# Altium PCB 82230KPC-1-K-1V0-241216.PcbDoc (part 1 of 2)
Units mm, origin at the board's own origin, x right, y up, seen from the top; angles counter-clockwise.
Board outline 63.4 x 81.4 mm, 2 copper layers (Top Layer, Bottom Layer); 105 components, 68 nets, 293 pads, 137 vias.
Unrouted connection lines stored in the file: 29.
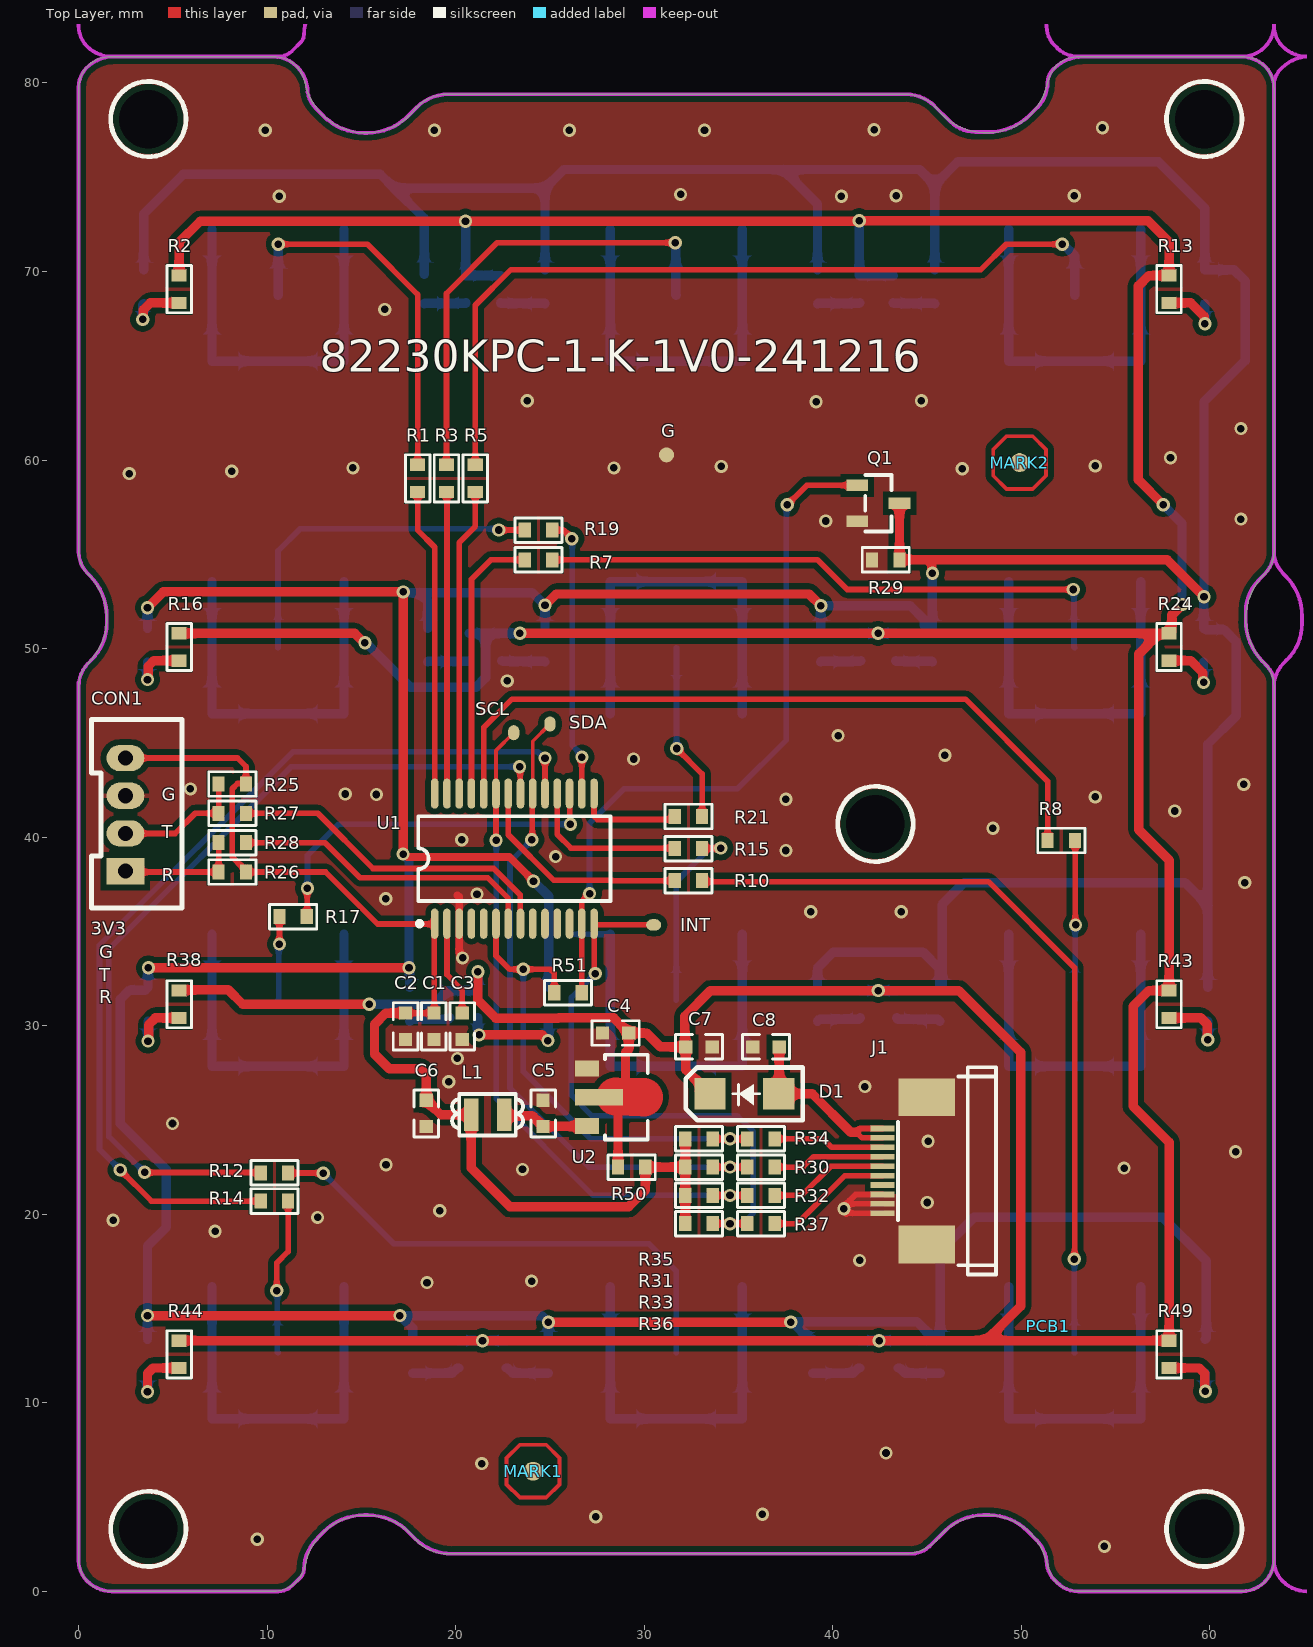
[diagram p0: Top Layer view]
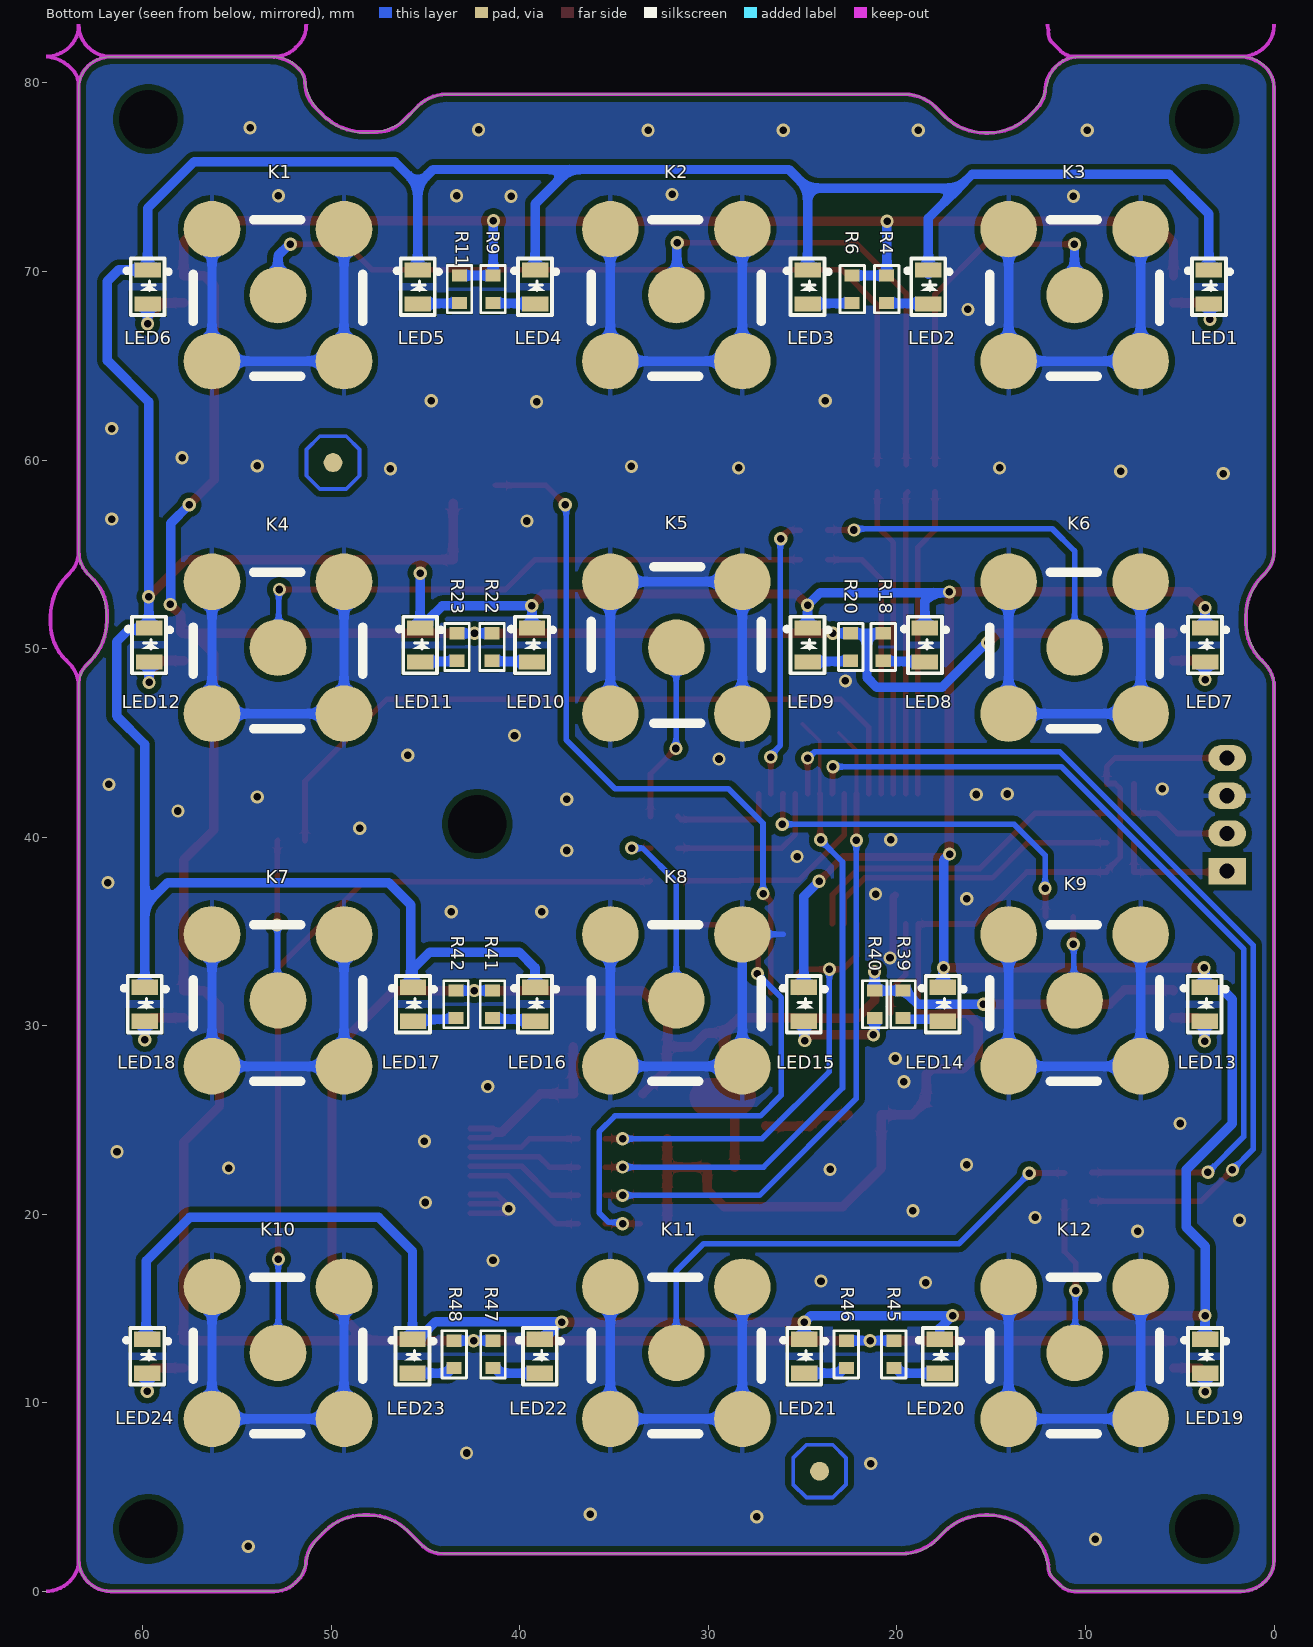
[diagram p1: Bottom Layer view, seen from below]
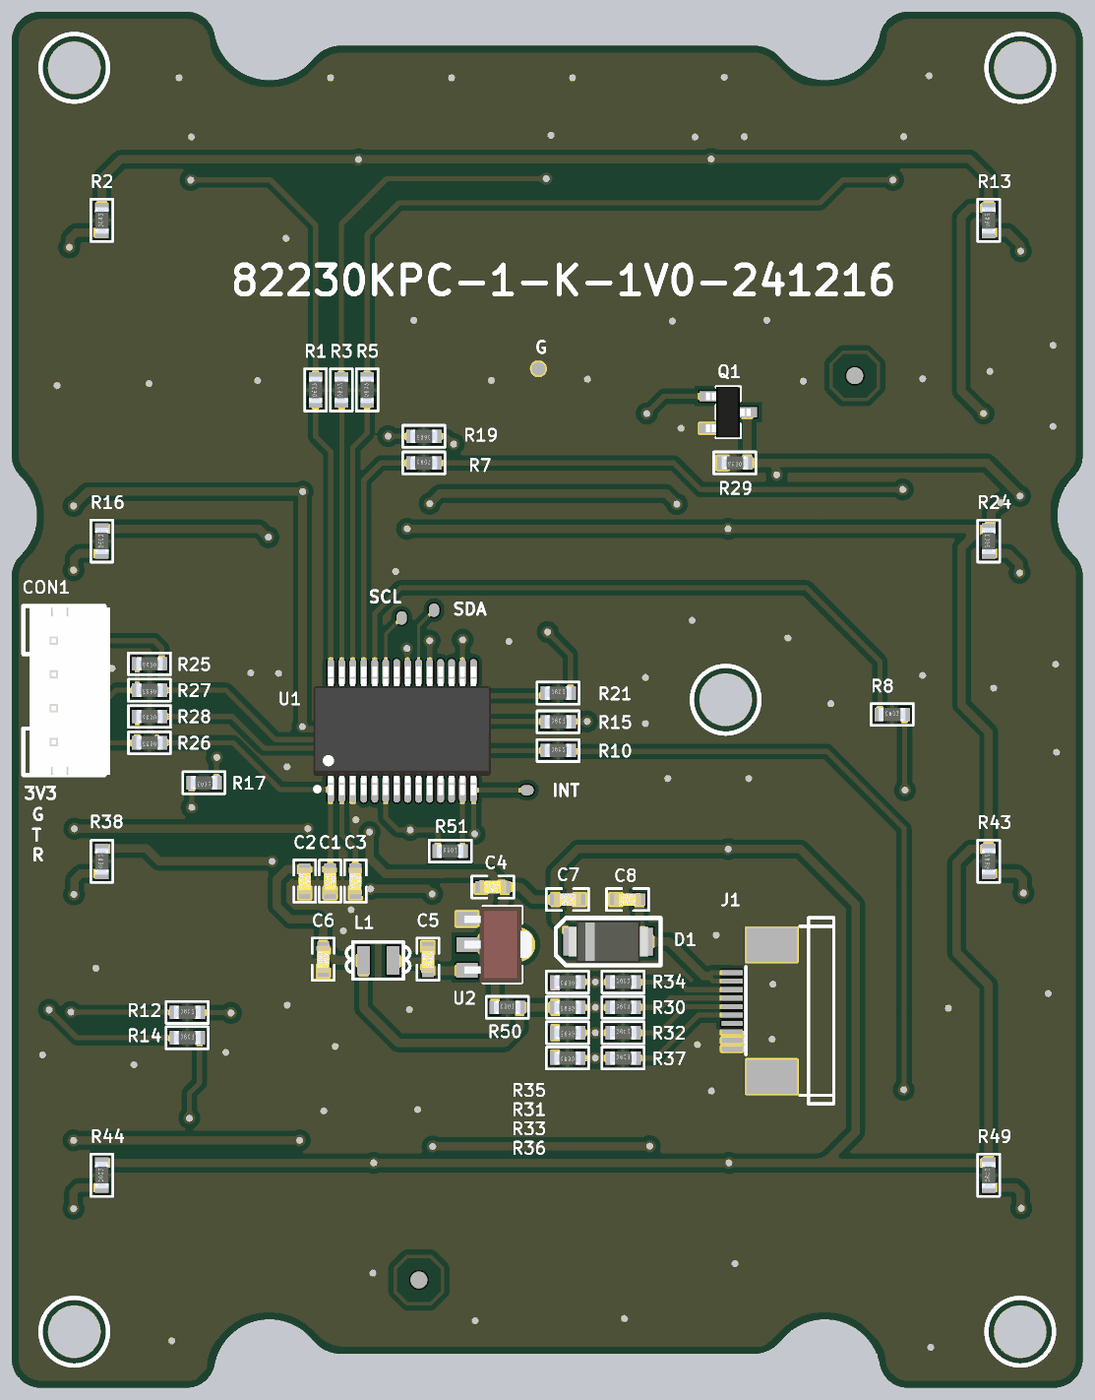
[diagram p3: 3D render of the assembled board from above, using the file's embedded part models]
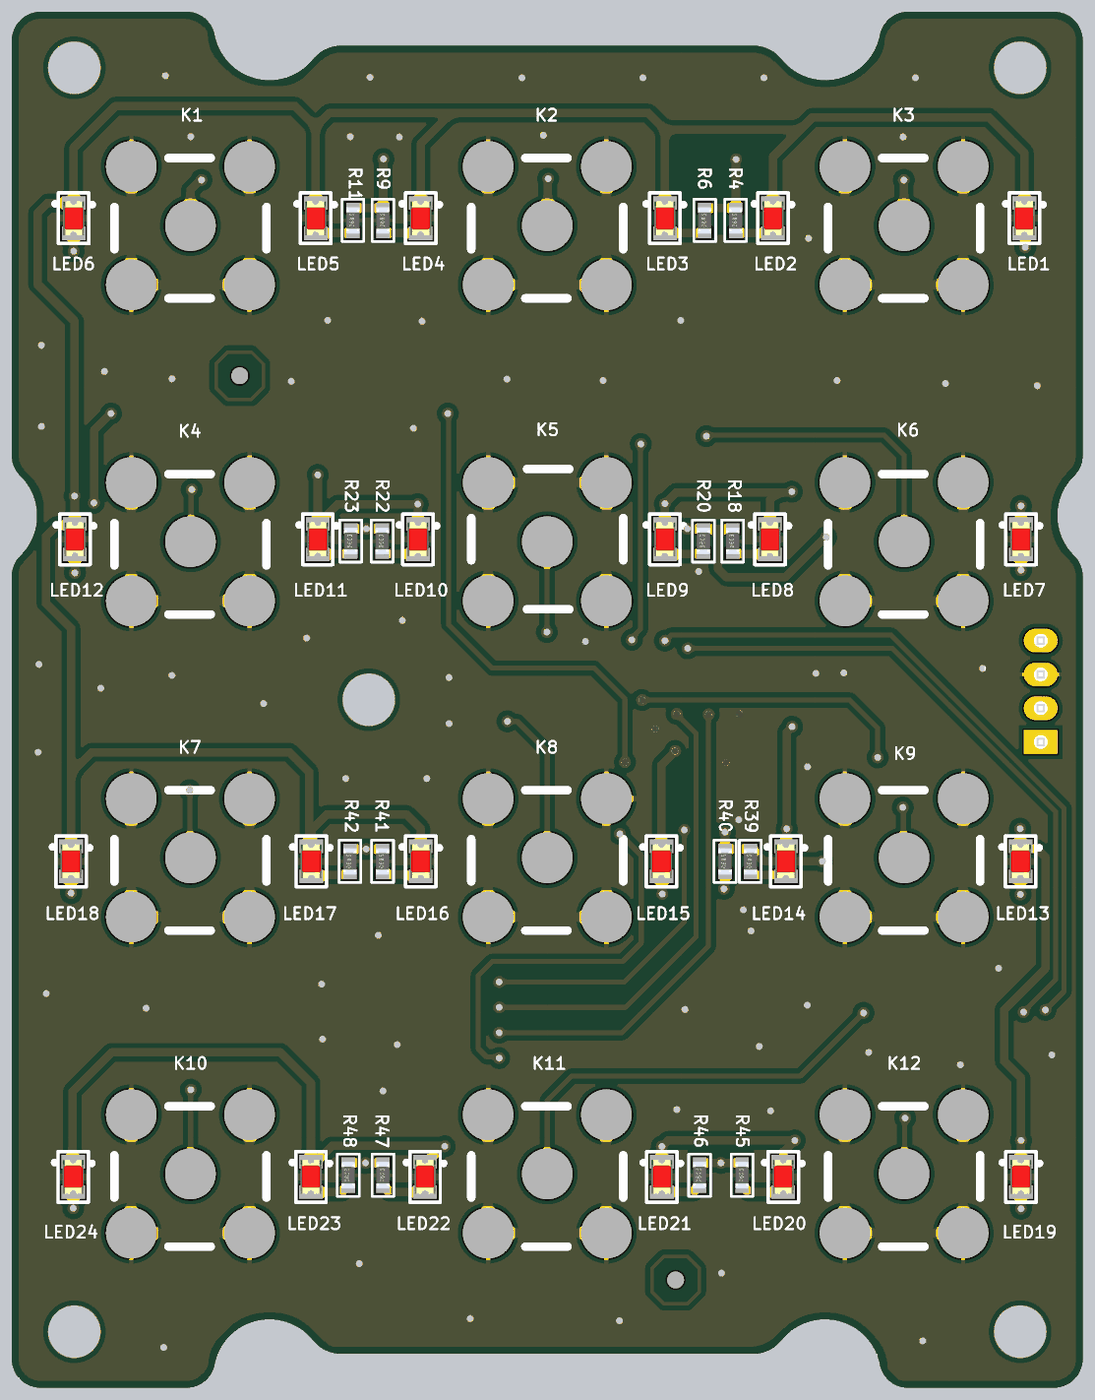
[diagram p4: 3D render of the assembled board from below, using the file's embedded part models]

## Layer stack, top to bottom
Top Solder: solder mask 0.0102, Solder Resist, Dk 3.5
Top Layer: signal copper 0.0356
Dielectric 1: dielectric 0.32, FR-4, Dk 4.8
Bottom Layer: signal copper 0.0356
Bottom Solder: solder mask 0.0102, Solder Resist, Dk 3.5

## Board outline
0,1.7 0,48.015 cw(c1.7,48.015) 0.51,49.229 ccw(c-1.8,51.586) 0.51,53.943 cw(c1.7,55.157) 0,55.157 0,79.7 cw(c1.7,79.7) 1.7,81.4 10.339,81.4 cw(c10.339,79.7) 12.008,80.023 ccw(c15.248,80.65) 17.818,78.58 cw(c19.532,77.2) 19.532,79.4 43.868,79.4 cw(c43.868,77.2) 45.582,78.58 ccw(c48.152,80.65) 51.392,80.023 cw(c53.061,79.7) 53.061,81.4 61.7,81.4 cw(c61.7,79.7) 63.4,79.7 63.4,55.157 cw(c61.7,55.157) 62.89,53.943 ccw(c65.2,51.586) 62.89,49.229 cw(c61.7,48.015) 63.4,48.015 63.4,1.7 cw(c61.7,1.7) 61.7,0 53.061,0 cw(c53.061,1.7) 51.392,1.377 ccw(c48.152,0.75) 45.582,2.82 cw(c43.868,4.2) 43.868,2 19.532,2 cw(c19.532,4.2) 17.818,2.82 ccw(c15.248,0.75) 12.008,1.377 cw(c10.339,1.7) 10.339,0 1.7,0 cw(c1.7,1.7)

## Design rules (kind name [scope] priority, off if disabled: settings)
Clearance [All] p1: gap=0.3 ignorepadtopadclearanceinfootprint=FALSE except(0.2: Arc-Arc Arc-Track Arc-SMDPad Arc-THPad Arc-Via Arc-Text Arc-Hole Track-Track Track-SMDPad Track-THPad Track-Via Track-Text Track-Hole SMDPad-SMDPad SMDPad-THPad SMDPad-Via SMDPad-Text SMDPad-Hole THPad-THPad THPad-Via THPad-Text THPad-Hole Via-Via Via-Text Via-Hole Text-Text Text-Hole)
ComponentClearance [All] p1: gap=0.05 collisioncheckmode=3 verticalgap=0.05 showdistances=FALSE
HoleSize [All] p1: absolutevalues=TRUE maxlimit=5 minlimit=0.025 maxpercent=80.000 minpercent=20.000
MinimumSolderMaskSliver [All] p1: minsoldermaskwidth=0.005
PolygonConnect [InComponentClass('KEY')] p1: thpad.connectstyle=Relief thpad.reliefconductorwidth=0.254 thpad.reliefentries=2 thpad.polygonreliefangle="0 Angle" thpad.airgapwidth=0.3 smdpad.connectstyle=Relief smdpad.reliefconductorwidth=0.254 smdpad.reliefentries=2 smdpad.polygonreliefangle="0 Angle" smdpad.airgapwidth=0.3 via.connectstyle=Direct via.reliefconductorwidth=0.254 via.reliefentries=2 via.polygonreliefangle="90 Angle" via.airgapwidth=0.254
PolygonConnect PolygonConnect_1 [All] p2: thpad.connectstyle=Relief thpad.reliefconductorwidth=0.254 thpad.reliefentries=4 thpad.polygonreliefangle="90 Angle" thpad.airgapwidth=0.254 smdpad.connectstyle=Direct smdpad.reliefconductorwidth=0.254 smdpad.reliefentries=4 smdpad.polygonreliefangle="90 Angle" smdpad.airgapwidth=0.254 via.connectstyle=Direct via.reliefconductorwidth=0.254 via.reliefentries=4 via.polygonreliefangle="90 Angle" via.airgapwidth=0.254
RoutingVias [All] p1: holewidth=0.4 width=0.6 viastyle="Through Hole" minholewidth=0.3 minwidth=0.5 maxholewidth=0.5 maxwidth=1
SilkToSilkClearance [All] p1: silktosilkclearance=0.1
SilkToSolderMaskClearance [IsPad] p1: minsilkscreentomaskgap=0.1 clearancetoexposedcopper=TRUE
SolderMaskExpansion [All] p1: expansion=0.102 istentingtop=FALSE
Width Width_PWR [All] p1: maxlimit=3 minlimit=0.2 preferedwidth=0.35 bottomlayer_maxwidth=0.5 minimp=50.000000 maximp=50.000000 favimp=50.000000
Width [All] p2: maxlimit=0.5 minlimit=0.15 preferedwidth=0.2
25 further rules are at their usual default settings.

## Classes and differential pairs
component class KEY: K1 K2 K3 K4 K5 K6 K7 K8 K9 K10 K11 K12
component class 00-82230KPC-1-K_README: PCB1

## Components (designator, comment, footprint, x,y, rotation, side; value= is the part's Value field where it differs from the comment)
C1 "106" C0603-Z 18.842,29.972 r270 top value=106_6V3_0603
C2 "104" C0603-Z 17.342,29.972 r270 top value=104_50V_0603
C3 "103" C0603-Z 20.343,29.972 r270 top value=103_50V_0603
C4 "106" C0603-Z 28.482,29.616 r180 top value=106_6V3_0603
C5 "NC" C0603-Z 24.635,25.349 r90 top value=106_6V3_0603
C6 "NC" C0603-Z 18.438,25.349 r270 top value=106_6V3_0603
C7 "NC" C0603-Z 32.902,28.88 r180 top value=104_50V_0603
C8 "106" C0603-Z 36.457,28.88 r0 top value=106_6V3_0603
CON1 "NC" PH4P2.0_VS-Z 2.486,41.199 r270 top value=PH4P-S-DIP
D1 "SS16" SMAF-Z 35.307,26.391 r180 top
J1 "FPC10P" FPC10_0.5-Z 43.812,22.301 r270 top value=FPC10P_0.5_LFC
K1 "10A-280G" SD-9X9-S 52.825,68.75 r180 bottom locked value=6X6X4.3
K2 "10A-280G" SD-9X9-S 31.7,68.75 r180 bottom locked value=6X6X4.3
K3 "10A-280G" SD-9X9-S 10.575,68.75 r180 bottom locked value=6X6X4.3
K4 "10A-280G" SD-9X9-S 52.825,50.05 r180 bottom locked value=6X6X4.3
K5 "10A-280G" SD-9X9-S 31.7,50.05 r0 bottom locked value=6X6X4.3
K6 "10A-280G" SD-9X9-S 10.575,50.05 r180 bottom locked value=6X6X4.3
K7 "10A-280G" SD-9X9-S 52.825,31.35 r180 bottom locked value=6X6X4.3
K8 "10A-280G" SD-9X9-S 31.7,31.35 r180 bottom locked value=6X6X4.3
K9 "10A-280G" SD-9X9-S 10.575,31.35 r180 bottom locked value=6X6X4.3
K10 "10A-280G" SD-9X9-S 52.825,12.65 r180 bottom locked value=6X6X4.3
K11 "10A-280G" SD-9X9-S 31.7,12.65 r180 bottom locked value=6X6X4.3
K12 "10A-280G" SD-9X9-S 10.575,12.65 r180 bottom locked value=6X6X4.3
L1 "NC" L0805-Z 21.689,25.273 r180 top value=220R_2.5A_0805
LED1 "正白色0805" LED0805AK-X 3.452,69.19 r270 bottom
LED2 "正白色0805" LED0805AK-X 18.336,69.19 r270 bottom
LED3 "正白色0805" LED0805AK-X 24.737,69.19 r270 bottom
LED4 "正白色0805" LED0805AK-X 39.189,69.19 r270 bottom
LED5 "正白色0805" LED0805AK-X 45.412,69.19 r270 bottom
LED6 "正白色0805" LED0805AK-X 59.738,69.19 r270 bottom
LED7 "正白色0805" LED0805AK-X 3.655,50.191 r270 bottom
LED8 "正白色0805" LED0805AK-X 18.514,50.191 r270 bottom
LED9 "正白色0805" LED0805AK-X 24.737,50.191 r270 bottom
LED10 "正白色0805" LED0805AK-X 39.353,50.191 r270 bottom
LED11 "正白色0805" LED0805AK-X 45.285,50.191 r270 bottom
LED12 "正白色0805" LED0805AK-X 59.662,50.191 r270 bottom
LED13 "正白色0805" LED0805AK-X 3.68,31.14 r270 bottom
LED14 "正白色0805" LED0805AK-X 17.574,31.14 r270 bottom
LED15 "正白色0805" LED0805AK-X 24.94,31.14 r270 bottom
LED16 "正白色0805" LED0805AK-X 39.189,31.14 r270 bottom
LED17 "正白色0805" LED0805AK-X 45.666,31.14 r270 bottom
LED18 "正白色0805" LED0805AK-X 59.89,31.14 r270 bottom
LED19 "正白色0805" LED0805AK-X 3.655,12.471 r270 bottom
LED20 "正白色0805" LED0805AK-X 17.726,12.471 r270 bottom
LED21 "正白色0805" LED0805AK-X 24.915,12.471 r270 bottom
LED22 "正白色0805" LED0805AK-X 38.935,12.471 r270 bottom
LED23 "正白色0805" LED0805AK-X 45.692,12.471 r270 bottom
LED24 "正白色0805" LED0805AK-X 59.763,12.471 r270 bottom
MARK1 "TEST" MARK1 24.102,6.375 r90 top
MARK2 "TEST" MARK1 49.908,59.868 r90 top
PCB1 "PCB1" PCB 51.432,14.072 r90 top
Q1 "KRC101S" SOT23_Z 42.415,57.709 r0 top
R1 "510R" R0603-Z 17.98,59.03 r90 top value=510R_0603_5%
R2 "150R" R0603-Z 5.331,69.063 r90 top value=150R_0603_5%
R3 "510R" R0603-Z 19.51,59.03 r90 top value=510R_0603_5%
R4 "150R" R0603-Z 20.546,69.063 r90 bottom value=150R_0603_5%
R5 "510R" R0603-Z 21.039,59.03 r90 top value=510R_0603_5%
R6 "150R" R0603-Z 22.375,69.063 r90 bottom value=150R_0603_5%
R7 "510R" R0603-Z 24.393,54.712 r0 top value=510R_0603_5%
R8 "510R" R0603-Z 52.118,39.827 r0 top value=510R_0603_5%
R9 "150R" R0603-Z 41.425,69.063 r90 bottom value=150R_0603_5%
R10 "510R" R0603-Z 32.343,37.694 r0 top value=510R_0603_5%
R11 "150R" R0603-Z 43.203,69.063 r90 bottom value=150R_0603_5%
R12 "510R" R0603-Z 10.386,22.201 r0 top value=510R_0603_5%
R13 "150R" R0603-Z 57.833,69.063 r90 top value=150R_0603_5%
R14 "510R" R0603-Z 10.386,20.701 r0 top value=510R_0603_5%
R15 "510R" R0603-Z 32.343,39.395 r0 top value=510R_0603_5%
R16 "150R" R0603-Z 5.331,50.089 r90 top value=150R_0603_5%
R17 "510R" R0603-Z 11.376,35.789 r180 top value=510R_0603_5%
R18 "150R" R0603-Z 20.724,50.089 r90 bottom value=150R_0603_5%
R19 "510R" R0603-Z 24.393,56.286 r180 top value=510R_0603_5%
R20 "150R" R0603-Z 22.451,50.089 r90 bottom value=150R_0603_5%
R21 "510R" R0603-Z 32.343,41.097 r0 top value=510R_0603_5%
R22 "150R" R0603-Z 41.475,50.089 r90 bottom value=150R_0603_5%
R23 "150R" R0603-Z 43.33,50.089 r90 bottom value=150R_0603_5%
R24 "150R" R0603-Z 57.833,50.089 r90 top value=150R_0603_5%
R25 "NC" R0603-Z 8.151,42.824 r180 top value=10K_0603_5%
R26 "NC" R0603-Z 8.151,38.151 r180 top value=10K_0603_5%
R27 "33R" R0603-Z 8.151,41.267 r180 top value=33R_0603_5%
R28 "33R" R0603-Z 8.151,39.709 r180 top value=33R_0603_5%
R29 "150R" R0603-Z 42.808,54.712 r180 top value=150R_0603_5%
R30 "33R" R0603-Z 36.192,22.503 r0 top value=33R_0603_5%
R31 "NC" R0603-Z 32.902,22.503 r180 top value=10K_0603_5%
R32 "33R" R0603-Z 36.192,21.002 r0 top value=33R_0603_5%
R33 "NC" R0603-Z 32.902,21.002 r180 top value=10K_0603_5%
R34 "33R" R0603-Z 36.192,24.003 r0 top value=33R_0603_5%
R35 "NC" R0603-Z 32.902,24.003 r180 top value=10K_0603_5%
R36 "NC" R0603-Z 32.902,19.502 r180 top value=10K_0603_5%
R37 "33R" R0603-Z 36.192,19.502 r0 top value=33R_0603_5%
R38 "150R" R0603-Z 5.331,31.14 r90 top value=150R_0603_5%
R39 "150R" R0603-Z 19.676,31.14 r90 bottom value=150R_0603_5%
R40 "150R" R0603-Z 21.177,31.14 r90 bottom value=150R_0603_5%
R41 "150R" R0603-Z 41.45,31.14 r90 bottom value=150R_0603_5%
R42 "150R" R0603-Z 43.38,31.14 r90 bottom value=150R_0603_5%
R43 "150R" R0603-Z 57.833,31.14 r90 top value=150R_0603_5%
R44 "150R" R0603-Z 5.331,12.573 r90 top value=150R_0603_5%
R45 "150R" R0603-Z 20.165,12.573 r90 bottom value=150R_0603_5%
R46 "150R" R0603-Z 22.679,12.573 r90 bottom value=150R_0603_5%
R47 "150R" R0603-Z 41.425,12.573 r90 bottom value=150R_0603_5%
R48 "150R" R0603-Z 43.482,12.573 r90 bottom value=150R_0603_5%
R49 "150R" R0603-Z 57.833,12.573 r90 top value=150R_0603_5%
R50 "0R" R0603-Z 29.334,22.503 r0 top value=0R_0603_5%
R51 "NC" R0603-Z 25.956,31.75 r0 top value=0R_0603_5%
U1 "SC92F8363B" SSOP28-Z 23.111,38.862 r0 top
U2 "NC" SOT-89-Z 27.282,26.213 r270 top

## Footprints (in the part's own frame and the unit in brackets; to place one, negate y for a bottom-side part, rotate by r counter-clockwise, add the part's x,y. Pads: shape width x height; smd on the part's side, far side on the other; paste and mask are expansions set on the pad)
C0603-Z [mm] "Chip Resistor, Body 1.6x0.8mm, IPC High Density"
  rect 0.7x0.7 smd: 1(-0.7,0) 2(0.7,0)
  silkscreen extent -1.25,-0.65 1.25,0.65, body extent -0.8,-0.4 0.8,0.4, height 0.8
FPC10_0.5-Z [mm]
  rect 0.3x1.25 smd: 1(2.25,-1.175) 2(1.75,-1.175) 3(1.25,-1.175) 4(0.75,-1.175) 5(0.25,-1.175) 6(-0.25,-1.175) 7(-0.75,-1.175) 8(-1.25,-1.175) 9(-1.75,-1.175) 10(-2.25,-1.175)
  rect 2x3 smd: 11(-3.9,1.175) 12(3.9,1.175)
  silkscreen extent -5.5,-0.35 5.5,4.85
L0805-Z [mm]
  rect 0.75x1.7 smd: 1(-0.884,-0.006) 2(0.866,-0.006)
  silkscreen extent -1.88,-1.1 1.88,1.1, body extent -1.3,-0.9 1.3,0.9, height 1.3
LED0805AK-X [mm]
  rect 0.8x1.4 smd: 1(0.9,0) 2(-0.9,0)
  silkscreen extent -1.5,-1.2 1.5,1.2, body extent -1.01,-0.62 1.01,0.63, height 1.1
MARK1 [mm]
  round 1 smd: 1(0,0)
  round 1 smd far side: 1(0,0)
  Top Layer lines w0.203: -0.7,1.4 -0.7,1.4 ; -0.7,1.4 -1.4,0.7 -1.4,-0.7 -0.7,-1.4 0.7,-1.4 1.4,-0.7 1.4,0.7 0.7,1.4 -0.7,1.4
  Bottom Layer lines w0.203: -0.7,1.4 -0.7,1.4 ; -0.7,1.4 -1.4,0.7 -1.4,-0.7 -0.7,-1.4 0.7,-1.4 1.4,-0.7 1.4,0.7 0.7,1.4 -0.7,1.4
PCB [mm]
PH4P2.0_VS-Z [mm]
  rect 1.4x2 hole 0.8: 1(3,0)
  oval 1.4x2 hole 0.8: 2(1,0) 3(-1,0) 4(-3,0)
  silkscreen extent -5.05,-1.8 4.95,3, body extent -4.95,-1.45 4.95,3.35, height 6
R0603-Z [mm] "Chip Resistor, Body 1.6x0.8mm, IPC High Density"
  rect 0.65x0.8 smd: 1(-0.725,0) 2(0.725,0)
  silkscreen extent -1.25,-0.65 1.25,0.65, body extent -0.8,-0.4 0.8,0.4, height 0.42
SD-9X9-S [mm] "SD-9X9-S"
  round 3 smd: 1(0,0) 2(-3.5,-3.5) 2(-3.5,3.5) 2(3.5,-3.5) 2(3.5,3.5)
  Top Layer lines w0.5: 3.5,3.5 3.5,-0.75 3.5,-3.5 -3.5,-3.5 -3.5,3.5
  silkscreen extent -4.5,-4.3 4.5,4
SMAF-Z [mm] "SODFL, 2-Leads, Body 2.55x4.65mm, IPC Medium Density"
  rect 1.65x1.65 smd: 1(-1.825,0) 2(1.825,0)
  silkscreen extent -3.1,-1.4 3.1,1.4, body extent -2.35,-1.25 2.35,1.25, height 1
SOT23_Z [mm] "SOT23, 3-Leads, Body 2.9x1.3mm, Pitch 0.95mm, Lead Span 2.3mm - Reverse Pinning, IPC Medium Density"
  rect 1.15x0.6 smd: 1(-1.125,0.95) 2(-1.125,-0.95) 3(1.125,0)
  silkscreen extent -0.7,-1.5 0.7,1.5, body extent -1.32,-1.5 1.32,1.5, height 1.08
SOT-89-Z [mil]
  rect 34x50 smd: 1(-60,-12.8) 3(60,-12.8)
  rect 34x100 smd: 2(0,12.8)
  Top Layer lines w80: -1.41,47.2 0,105.87
  silkscreen extent -89,25 89,114, body extent -89,-19 89,138, height 59
SSOP28-Z [mm]
  oval 0.4x1.6 smd: 1(-4.225,-3.45) 2(-3.575,-3.45) 3(-2.925,-3.45) 4(-2.275,-3.45) 5(-1.625,-3.45) 6(-0.975,-3.45) 7(-0.325,-3.45) 8(0.325,-3.45) 9(0.975,-3.45) 10(1.625,-3.45) 11(2.275,-3.45) 12(2.925,-3.45) 13(3.575,-3.45) 14(4.225,-3.45) 15(4.225,3.45) 16(3.575,3.45) 17(2.925,3.45) 18(2.275,3.45) 19(1.625,3.45) 20(0.975,3.45) 21(0.325,3.45) 22(-0.325,3.45) 23(-0.975,3.45) 24(-1.625,3.45) 25(-2.275,3.45) 26(-2.925,3.45) 27(-3.575,3.45) 28(-4.225,3.45)
  silkscreen extent -5.15,-3.57 5.1,2.25, body extent -5.25,-3.8 5.25,3.8, height 1.75

## Part data
C1 C4 C5 C6 C8: library part 106_6V3_0603, "电容器，0603贴片，106, 6V3 精度20%", CLASS=CC03, Code=A.12060310600003, KIND=KINDD, NUM=10000000, PINN=2, SUB-CLS=6.3
C2 C7: library part 104_50V_0603, "电容器，0603贴片，104, 50V 精度10%", CLASS=CC03, Code=A.12060310400003, KIND=KINDB, NUM=100000, PINN=2, SUB-CLS=50
C3: library part 103_50V_0603, "电容器，0603贴片，103, 50V 精度10%", CLASS=CC03, Code=A.12060310300002, KIND=KINDE, NUM=10000, PINN=2, SUB-CLS=50
CON1: library part PH4P-S-DIP, "4PIN直插插座（银针外露2.5mm，数据参考看上方物料图片）,4PIN插座 脚距2.0mm 插座180°米色耐高温  SCD2001AZ-104139", CLASS=CONN-DIP, Code=A.22120000400001, KIND=KINDD, NUM=2, PINN=4, Updated time=2023.11.06
D1: "贴片肖特基二极管，SMAF SS16（印字SS16）", CLASS=Schottky, Code=A.15400701600001, DATASHEET=YES, KIND=KINDA, PINN=2, TIP="VR=60V  IF=1A  VF=0.7V", Updated time=2023.10.22
J1: library part FPC10P_0.5_LFC, "FPC连接器 软排线插座 间距0.5mm 10P 下接触 卧贴翻盖式 (卓誉佳）（编带式）", CLASS=FPC-SOCKET-0.5, Code=A.22000501000002, KIND=KINDC, NUM=10, PINN=10, Updated time=2023.11.06
K1 K2 K3 K4 K5 K6 K7 K8 K9 K10 K11 K12: library part KEY_4P_SMD_6X6MM, "锅仔片", Part Number_AK=SWKS04001XX, PCB DECAL=KEY_4P_SMD_6X6MM
L1: library part 220R_2.5A_0805, "磁珠 0805贴片 2.5A 220ohm@100MHZ DCR=0.050", CLASS=IND-B, Code=A.23080522000001, KIND=KINDC, PINN=2
LED1 LED2 LED3 LED4 LED5 LED6 LED7 LED8 LED9 LED10 LED11 LED12 LED13 LED14 LED15 LED16 LED17 LED18 LED19 LED20 LED21 LED22 LED23 LED24: "贴片发光二极管, 0805贴片LED 正白色 发光二极管", CLASS=LED-0805, Code=A.18080540000001, DATASHEET=NO, KIND=KINDC, PINN=2, TIP="0805贴片LED 正白色", Updated time=2023.10.22
PCB1: "PCB  82230KC-1-K 按键板 版本号：82230KC-1-K-1V0-241216*3版 尺寸：190.2*162.8双面板  铜厚1/1oz 板厚 1.6M 过孔盖油 无铅喷锡 绿油白丝印字 全部测试"
Q1: "贴片三极管，KRC101S  SOT-23 NPN型带阻三极管", CLASS=NPN-R2, Code=A.16112301010001, DATASHEET=YES, KIND=KINDA, PINN=3, TIP="R1=R2=4K7 VCEO=50V IC=0.1A PC=0.2W", Updated time=2023.10.22
R1 R3 R5 R7 R8 R10 R12 R14 R15 R17 R19 R21: library part 510R_0603_5%, "电阻器，0603贴片，510R,精度5%", CLASS=RES0603-0.05, Code=A.11060351000001, KIND=KINDC, NUM=510, PINN=2, Updated time=2023.09.28
R2 R4 R6 R9 R11 R13 R16 R18 R20 R22 R23 R24 R29 R38 R39 R40 R41 R42 R43 R44 R45 R46 R47 R48 R49: library part 150R_0603_5%, "电阻器，0603贴片，150R,精度5%", CLASS=RES0603-0.05, Code=A.11060315000001, KIND=KINDC, NUM=150, PINN=2, Updated time=2023.09.28
R25 R26 R31 R33 R35 R36: library part 10K_0603_5%, "电阻器，0603贴片，10K,精度5%", CLASS=RES0603-0.05, Code=A.11060310300001, KIND=KINDC, NUM=10000, PINN=2, Updated time=2023.09.28
R27 R28 R30 R32 R34 R37: library part 33R_0603_5%, "电阻器，0603贴片，33R,精度5%", CLASS=RES0603-0.05, Code=A.11060303300001, KIND=KINDC, NUM=33, PINN=2, Updated time=2023.09.28
R50 R51: library part 0R_0603_5%, "电阻器，0603贴片，0R,精度5%", CLASS=RES0603-0.05, Code=A.11060300000001, KIND=KINDC, NUM=0, PINN=2, Updated time=2023.09.28
U2: library part 7905, "三端稳压器，三端稳压器HT7533 电流100mA SOT-89", Code=A.24118975330001
U1: PCB DECAL=SSOP-28_L10.2-W5.3-P0.65-LS7.8-TL

## Free pads (board coordinates)
  round 0 hole 3.1: 6(3.7,3.314) 7(59.7,3.314) 8(42.262,40.7) 9(59.7,78.086) 10(3.7,78.086)
  oval 0.8x0.6 smd: 11(30.5,35.35)
  oval 0.6x0.8 smd: 12(25,46) 13(23.08,45.54)
  round 0.8 smd: 14(31.18,60.28)

## Via types
v1: diameter 0.7, hole 0.4, Top Layer to Bottom Layer, tented both sides, 137 vias

## Nets (pads, with @x,y where several pads share a name; then routed paths per layer and width w, separated by ;. In a path a pad name is that pad's centre, name@x,y a point inside that pad or via, vN(x,y) a via of type N, cw(c..) or ccw(c..) an arc to the next point about the centre after c; other vN are vias at no path point)
5V-R: C4.1 C7.2 D1.2 R2.2 R4.2 R6.2 R9.2 R11.2 R13.2 R16.2 R18.2 R20.2 R22.2 R23.2 R24.2 R38.2 R39.2 R40.2 R41.2 R42.2 R43.2 R44.2 R45.2 R46.2 R47.2 R48.2 R49.2 R50.1 U2.2 | length 325.6
  Top Layer w0.5: R44.2@5.331,13.298 v1(21.422,13.298) v1(42.453,13.298) 48.13,13.298 ; R38.2@5.331,31.865 5.368,31.902 7.947,31.902 8.709,31.14 v1(15.415,31.14) ; R16.2@5.331,50.814 14.636,50.814 15.132,50.317 v1(15.186,50.317) ; R2.2@5.331,69.788 5.331,71.552 6.449,72.669 v1(20.52,72.669) 41.374,72.669 v1(41.399,72.695) 56.715,72.695 57.833,71.577 R13.2@57.833,69.788 56.755,69.788 56.207,69.24 56.207,58.953 v1(57.528,57.633) ; v1(21.181,32.868) 21.177,32.863 21.177,31.348 22.121,30.404 25.448,30.404 25.461,30.416 28.382,30.416 C4.1@29.182,29.616 ; v1(23.404,50.814) v1(42.403,50.814) 57.325,50.814 ; U2.2@28.481,26.249 28.627,26.395 28.663,26.395 29.004,26.736 29.004,28.587 29.182,28.765 C4.1@29.182,29.616 ; R50.1@28.609,22.504 U2.2@28.609,26.085 ; D1.2@33.482,26.391 32.202,27.671 C7.2@32.202,28.88 ; v1(58.544,52.349) 57.983,51.788 57.983,50.889 57.908,50.814 R24.2@57.833,50.814 57.325,50.814 ; C4.1@29.182,29.616 30.122,29.616 30.858,28.88 C7.2@32.202,28.88 ; C7.2@32.202,28.88 32.154,28.928 32.154,30.505 33.514,31.865 v1(42.415,31.865) 46.685,31.865 49.959,28.591 49.959,15.127 48.13,13.298 ; 48.13,13.298 R49.2@57.833,13.298 57.833,23.825 55.927,25.731 55.927,31.038 56.755,31.865 R43.2@57.833,31.865 57.833,38.786 56.233,40.386 56.233,49.722 57.325,50.814
  Bottom Layer w0.5: v1(15.186,50.317) 15.241,50.317 17.603,47.955 21.079,47.955 21.587,48.463 21.587,50.814 ; v1(15.415,31.14) 18.876,31.14 19.601,31.865 R39.2@19.676,31.865 R40.2@21.177,31.865 21.179,31.868 21.179,32.865 v1(21.181,32.868) ; R45.2@20.165,13.298 v1(21.422,13.298) R46.2@22.679,13.298 ; v1(20.52,72.669) 20.533,72.657 20.533,69.8 R4.2@20.546,69.788 R6.2@22.375,69.788 ; R18.2@20.724,50.814 21.587,50.814 ; v1(23.404,50.814) R20.2@22.451,50.814 21.587,50.814 ; v1(41.399,72.695) 41.412,72.682 41.412,69.8 R9.2@41.425,69.788 R11.2@43.203,69.788 ; R47.2@41.425,13.298 v1(42.453,13.298) R48.2@43.482,13.298 ; R41.2@41.45,31.865 v1(42.415,31.865) R42.2@43.38,31.865 ; R22.2@41.475,50.814 v1(42.403,50.814) R23.2@43.33,50.814 ; v1(57.528,57.633) 58.519,56.642 58.519,52.375 v1(58.544,52.349)
GND: C1.2 C2.2 C3.2 C4.2 C5.2 C6.2 C7.1 C8.1 CON1.3 J1.1 J1.2 J1.3 J1.11 J1.12 K1.2 K2.2 K3.2 K4.2 K5.2 K6.2 K7.2 K8.2 K9.2 K10.2 K11.2 K12.2 pad.14 Q1.2 R29.2 U1.3 U2.1 | length 11.6
  Top Layer w0.3: v1@40.713,20.015 40.749,20.051 J1.1@42.637,20.051 ; J1.2@42.637,20.551 40.716,20.551 41.216,21.051 J1.3@42.637,21.051
  Top Layer w0.4: 20.089,36.932 20.186,36.834 U1.3@20.186,35.412 20.186,33.862 20.367,33.681 v1(20.367,33.6)
  Bottom Layer w0.3: 26.032,34.849 26.033,34.85 K8.2@28.2,34.85
  other v1: 54.404,2.388 9.471,2.769 27.429,3.962 36.268,4.089 21.384,6.782 42.822,7.341 18.477,16.378 24.026,16.459 41.421,17.554 7.236,19.101 1.826,19.685 12.672,19.837 19.149,20.193 40.586,20.295 45.006,20.625 23.543,22.377 55.445,22.454 16.304,22.631 61.364,23.317 45.057,23.876 4.979,24.816 41.704,26.772 19.631,27.026 20.089,28.27 38.834,36.043 43.634,36.043 16.294,36.733 21.13,36.982 61.846,37.592 25.295,38.97 37.513,39.294 20.322,39.862 48.491,40.474 58.132,41.39 37.513,42.012 53.921,42.139 15.796,42.266 14.145,42.291 5.93,42.56 61.795,42.799 29.436,44.147 45.946,44.348 40.282,45.39 22.73,48.285 39.621,56.769 61.643,56.871 2.69,59.284 8.125,59.411 46.86,59.538 14.551,59.588 28.394,59.588 34.084,59.665 53.921,59.69 57.909,60.122 61.643,61.671 39.113,63.094 23.797,63.144 44.701,63.144 16.234,67.99 10.64,73.99 40.459,73.99 43.355,74.016 52.804,74.016 31.925,74.092 9.903,77.495 18.869,77.495 26.032,77.495 33.195,77.495 42.187,77.521 54.302,77.622
INT: pad.11 R36.1 R37.1 U1.14 | length 30.9
  Top Layer w0.3: U1.14@27.336,35.412 27.336,35.396 U1.14@27.355,35.377 ; v1(27.4,32.764) 27.355,32.808 U1.14@27.355,35.377 ; pad.11@30.5,35.35 27.382,35.35 U1.14@27.355,35.377 ; R36.1@33.627,19.502 v1(34.547,19.502) R37.1@35.467,19.502
  Bottom Layer w0.3: v1(27.4,32.764) 26.134,31.498 26.134,26.322 27.233,25.222 34.948,25.222 35.786,24.384 35.786,20.066 35.299,19.579 34.624,19.579 v1(34.547,19.502)
KEY_LED_EN_RST: R34.1 R35.1 R51.1 U1.6 | length 25.9
  Top Layer w0.3: U1.6@22.136,35.412 22.136,33.716 22.857,32.995 v1(23.583,32.995) 25.016,32.995 25.231,32.78 R51.1@25.231,31.75 ; R35.1@33.627,24.003 v1(34.547,24.003) R34.1@35.467,24.003
  Bottom Layer w0.3: v1(23.583,32.995) 23.583,27.567 27.146,24.003 v1(34.547,24.003)
LED_EN: Q1.1 R51.2 U1.13 | length 38
  Top Layer w0.3: R51.2@26.686,31.755 26.686,36.595 v1(27.099,37.008) ; v1(37.589,57.633) 38.615,58.659 Q1.1@41.29,58.659
  Bottom Layer w0.3: v1(27.099,37.008) 27.099,40.742 28.928,42.57 34.948,42.57 37.538,45.161 37.538,57.582 v1(37.589,57.633)
NetC3_1: C3.1 U1.2 | length 5.1
  Top Layer w0.3: U1.2@19.536,35.412 19.536,32.709 20.343,31.902 C3.1@20.343,30.672
NetC5_1: C5.1 L1.1 U2.3 | length 4.7
  Top Layer w0.5: L1.1@22.572,25.279 22.637,25.279 22.697,25.219 24.065,25.219 C5.1@24.635,24.649 24.655,24.669 26.937,24.669 U2.3@26.957,24.689
NetC8_2: C8.2 D1.1 J1.9 J1.10 | length 10.4
  Top Layer w0.3: J1.9@42.637,24.051 41.554,24.051 41.247,24.359 41.439,24.551 J1.10@42.637,24.551
  Top Layer w0.5: C8.2@37.157,28.88 37.157,26.416 D1.1@37.132,26.391 38.91,26.391 40.942,24.359 41.247,24.359
NetCON1_1: CON1.1 R26.2 R28.2 | length 6.5
  Top Layer w0.3: CON1.1@2.486,38.199 2.534,38.151 R26.2@7.426,38.151 R28.2@7.426,39.709
NetCON1_2: CON1.2 R25.2 R27.2 | length 6.9
  Top Layer w0.3: CON1.2@2.486,40.199 5.119,40.199 6.186,41.267 R27.2@7.426,41.267 R25.2@7.426,42.824
NetJ1_5: J1.5 R37.2 | length 6.8
  Top Layer w0.3: R37.2@36.917,19.502 38.092,19.502 40.641,22.051 J1.5@42.637,22.051
NetJ1_6: J1.6 R32.2 | length 6.4
  Top Layer w0.3: R32.2@36.917,21.002 38.348,21.002 39.897,22.551 J1.6@42.637,22.551
NetJ1_7: J1.7 R30.2 | length 5.9
  Top Layer w0.3: R30.2@36.917,22.503 38.426,22.503 38.974,23.051 J1.7@42.637,23.051
NetJ1_8: J1.8 R34.2 | length 5.9
  Top Layer w0.3: R34.2@36.917,24.003 39.494,24.003 39.946,23.551 J1.8@42.637,23.551
NetK1_1: K1.1 R5.2 | length 43.9
  Top Layer w0.3: R5.2@21.039,59.755 21.039,68.211 22.932,70.104 47.851,70.104 49.197,71.45 v1(52.169,71.45)
  Bottom Layer w0.5: v1(52.169,71.45) 52.223,71.45 52.825,70.848 K1.1@52.825,68.75
NetK2_1: K2.1 R3.2 | length 25.1
  Top Layer w0.3: R3.2@19.51,59.755 19.51,68.839 22.197,71.526 v1(31.646,71.526)
  Bottom Layer w0.5: v1(31.646,71.526) 31.673,71.499 31.673,68.777 K2.1@31.7,68.75
NetK3_1: K3.1 R1.2 | length 20.2
  Top Layer w0.3: v1(10.589,71.45) 15.313,71.45 17.98,68.783 R1.2@17.98,59.755
  Bottom Layer w0.5: K3.1@10.575,68.75 10.582,68.757 10.582,71.443 v1(10.589,71.45)
NetK4_1: K4.1 R7.2 | length 31.4
  Top Layer w0.3: R7.2@25.118,54.712 39.189,54.712 40.764,53.137 v1(52.753,53.137)
  Bottom Layer w0.3: v1(52.753,53.137) 52.789,53.101 52.789,50.086 K4.1@52.825,50.05
NetK5_1: K5.1 R21.2 | length 9.5
  Top Layer w0.3: v1(31.722,44.704) 33.068,43.358 R21.2@33.068,41.097
  Bottom Layer w0.3: K5.1@31.7,50.05 31.711,50.039 31.711,44.715 v1(31.722,44.704)
NetK6_1: K6.1 R19.2 | length 18.7
  Top Layer w0.3: v1(22.278,56.292) 22.281,56.289 23.665,56.289 R19.2@23.668,56.286
  Bottom Layer w0.3: K6.1@10.575,50.05 10.575,55.18 11.757,56.363 22.208,56.363 v1(22.278,56.292)
NetK7_1: K7.1 R8.2 | length 8.5
  Top Layer w0.3: R8.2@52.843,39.827 52.859,39.811 52.859,35.366 v1(52.875,35.35)
  Bottom Layer w0.3: K7.1@52.825,31.35 52.85,31.375 52.85,35.325 v1(52.875,35.35)
NetK8_1: K8.1 R15.2 | length 10.4
  Top Layer w0.3: R15.2@33.068,39.421 33.081,39.408 34.046,39.408 v1(34.059,39.421)
  Bottom Layer w0.3: K8.1@31.7,31.35 31.7,37.637 33.484,39.421 v1(34.059,39.421)
NetK9_1: K9.1 R17.2 | length 4.5
  Top Layer w0.3: v1(10.651,34.329) R17.2@10.651,35.789
  Bottom Layer w0.3: K9.1@10.575,31.35 10.613,31.388 10.613,34.291 v1(10.651,34.329)
NetK10_1: K10.1 R10.2 | length 42.1
  Top Layer w0.3: R10.2@33.093,37.694 33.144,37.643 48.257,37.643 52.825,33.075 52.825,17.649 v1(52.804,17.628)
  Bottom Layer w0.3: v1(52.804,17.628) 52.814,17.617 52.814,12.661 K10.1@52.825,12.65
NetK11_1: K11.1 R12.2 | length 27.1
  Top Layer w0.3: R12.2@11.111,22.201 11.124,22.188 12.963,22.188 v1(12.977,22.174)
  Bottom Layer w0.3: v1(12.977,22.174) 16.712,18.439 30.25,18.439 31.7,16.989 K11.1@31.7,12.65
NetK12_1: K12.1 R14.2 | length 8.3
  Top Layer w0.3: v1(10.513,15.951) 10.513,17.424 11.111,18.022 R14.2@11.111,20.701
  Bottom Layer w0.3: v1(10.513,15.951) 10.544,15.92 10.544,12.681 K12.1@10.575,12.65
NetLED1_1: LED1.1 R2.1 | length 3.4
  Top Layer w0.5: v1(3.401,67.462) 3.439,67.501 3.439,67.977 3.799,68.338 R2.1@5.331,68.338
  Bottom Layer w0.5: v1(3.401,67.462) 3.401,68.239 LED1.1@3.452,68.29
NetLED1_2: LED1.2 LED2.2 LED3.2 LED4.2 LED5.2 LED6.2 LED7.2 LED8.2 LED9.2 LED10.2 LED11.2 LED12.2 LED13.2 LED14.2 LED15.2 LED16.2 LED17.2 LED18.2 LED19.2 LED20.2 LED21.2 LED22.2 LED23.2 LED24.2 Q1.3 R29.1 | length 371.7
  Top Layer w0.4: v1@17.442,38.951 22.845,38.951 v1(24.127,37.668)
  Top Layer w0.5: v1(3.655,14.63) v1(17.044,14.63) ; v1(3.655,52.172) 4.493,53.01 v1(17.218,53.01) 17.213,53.004 17.213,39.11 v1(17.207,39.105) ; v1(3.706,33.071) v1(17.523,33.071) ; v1(24.737,52.299) 25.337,52.899 38.742,52.899 v1(39.367,52.273) ; v1(24.915,14.275) 24.918,14.279 37.768,14.279 v1(37.772,14.282) ; Q1.3@43.54,57.709 43.537,57.705 43.537,54.715 44.993,54.715 ; v1(45.285,54) 45.247,54.039 45.247,54.461 44.993,54.715 ; v1(59.687,52.756) 57.728,54.715 44.993,54.715
  Bottom Layer w0.5: LED1.2@3.452,70.09 3.452,73.05 5.56,75.159 15.999,75.159 16.736,74.422 ; LED19.2@3.655,13.371 v1(3.655,14.63) 3.655,18.313 4.645,19.304 4.645,22.377 2.207,24.816 2.207,31.394 2.703,31.89 3.53,31.89 LED13.2@3.68,32.04 3.68,33.045 v1(3.706,33.071) ; LED7.2@3.655,51.091 v1(3.655,52.172) ; v1(17.207,39.105) 17.523,38.788 v1(17.523,33.071) 17.549,33.045 17.549,32.066 LED14.2@17.574,32.04 ; v1(17.218,53.01) 17.257,52.972 18.069,52.972 ; LED20.2@17.726,13.371 17.726,13.971 17.703,13.971 v1(17.044,14.63) 24.559,14.63 v1(24.915,14.275) LED21.2@24.915,13.371 ; LED2.2@18.336,69.861 18.336,72.822 16.736,74.422 ; LED8.2@18.514,51.091 18.514,52.527 18.069,52.972 ; v1(24.127,37.668) 24.94,36.855 LED15.2@24.94,32.04 ; LED9.2@24.737,51.091 v1(24.737,52.299) 24.064,52.972 18.069,52.972 ; LED3.2@24.737,70.09 24.737,74.422 ; v1@37.797,14.307 44.456,14.307 45.392,13.371 LED23.2@45.692,13.371 45.692,18.045 47.485,19.837 57.503,19.837 59.814,17.526 59.814,13.422 LED24.2@59.763,13.371 ; v1@37.864,14.244 v1@37.864,14.282 ; v1@37.927,14.237 38.485,13.679 38.485,13.521 38.635,13.371 LED22.2@38.935,13.371 ; LED16.2@39.189,32.04 39.189,33.071 40.028,33.909 44.777,33.909 45.666,33.02 LED17.2@45.666,32.04 45.793,32.167 45.793,36.424 46.962,37.592 58.671,37.592 59.89,36.373 ; LED4.2@39.189,70.09 39.189,73.584 37.361,75.413 ; LED10.2@39.353,51.091 39.36,51.098 39.36,52.266 v1(39.367,52.273) 44.103,52.273 44.835,51.541 44.835,51.241 44.985,51.091 LED11.2@45.285,51.091 v1(45.285,54) ; LED5.2@45.412,70.09 45.412,74.6 ; LED12.2@59.662,51.091 59.675,51.104 59.675,52.743 v1(59.687,52.756) 59.687,63.094 61.873,65.28 61.873,69.493 61.276,70.09 LED6.2@59.738,70.09 59.738,73.355 57.274,75.819 46.632,75.819 45.412,74.6 ; LED12.2@59.694,51.123 59.807,51.01 60.741,51.01 61.388,50.364 61.388,46.43 59.89,44.933 59.89,36.373 ; LED18.2@59.89,32.04 59.89,36.373 ; 16.736,74.422 24.737,74.422 ; 24.737,74.422 25.727,75.413 37.361,75.413 ; 37.361,75.413 44.6,75.413 45.412,74.6
NetLED2_1: LED2.1 R4.1 | length 2.2
  Bottom Layer w0.5: LED2.1@18.336,68.29 18.36,68.314 20.522,68.314 R4.1@20.546,68.338
NetLED3_1: LED3.1 R6.1 | length 2.4
  Bottom Layer w0.5: R6.1@22.375,68.338 22.399,68.314 24.713,68.314 LED3.1@24.737,68.29
NetLED4_1: LED4.1 R9.1 | length 2.3
  Bottom Layer w0.5: LED4.1@39.189,68.29 39.213,68.314 41.401,68.314 R9.1@41.425,68.338
NetLED5_1: LED5.1 R11.1 | length 2.2
  Bottom Layer w0.5: R11.1@43.203,68.338 43.227,68.314 45.388,68.314 LED5.1@45.412,68.29
NetLED6_1: LED6.1 R13.1 | length 3.6
  Top Layer w0.5: R13.1@57.833,68.338 58.983,68.338 59.7,67.621 59.7,67.272 v1(59.738,67.234)
  Bottom Layer w0.5: v1(59.738,67.234) LED6.1@59.738,68.29
NetLED7_1: LED7.1 R16.1 | length 3.4
  Top Layer w0.5: v1(3.655,48.362) 3.693,48.4 3.693,49.071 3.986,49.364 R16.1@5.331,49.364
  Bottom Layer w0.5: v1(3.655,48.362) LED7.1@3.655,49.291
NetLED8_1: LED8.1 R18.1 | length 2.2
  Bottom Layer w0.5: LED8.1@18.514,49.291 18.55,49.327 20.687,49.327 R18.1@20.724,49.364
NetLED9_1: LED9.1 R20.1 | length 2.3
  Bottom Layer w0.5: R20.1@22.451,49.364 22.487,49.327 24.701,49.327 LED9.1@24.737,49.291
NetLED10_1: LED10.1 R22.1 | length 2.2
  Bottom Layer w0.5: LED10.1@39.353,49.291 39.389,49.327 41.439,49.327 R22.1@41.475,49.364
NetLED11_1: LED11.1 R23.1 | length 2
  Bottom Layer w0.5: R23.1@43.33,49.364 43.366,49.327 45.249,49.327 LED11.1@45.285,49.291
NetLED12_1: LED12.1 R24.1 | length 3.7
  Top Layer w0.5: R24.1@57.833,49.364 58.983,49.364 59.624,48.723 59.624,48.247 v1(59.662,48.209)
  Bottom Layer w0.5: v1(59.662,48.209) LED12.1@59.662,49.291
NetLED13_1: LED13.1 R38.1 | length 3.7
  Top Layer w0.5: v1(3.68,29.185) 3.718,29.223 3.718,30.061 4.073,30.415 R38.1@5.331,30.415
  Bottom Layer w0.5: v1(3.68,29.185) LED13.1@3.68,30.24